# Altium PCB 电子脚铐本体电池转接板V3-改版.PcbDoc
Units mm, origin at the board's own origin, x right, y up, seen from the top; angles counter-clockwise.
Board outline 39.1 x 20.6 mm, 2 copper layers (Top Layer, Bottom Layer), stack 1.071 mm thick; 3 components, 2 nets, 5 pads, 0 vias.
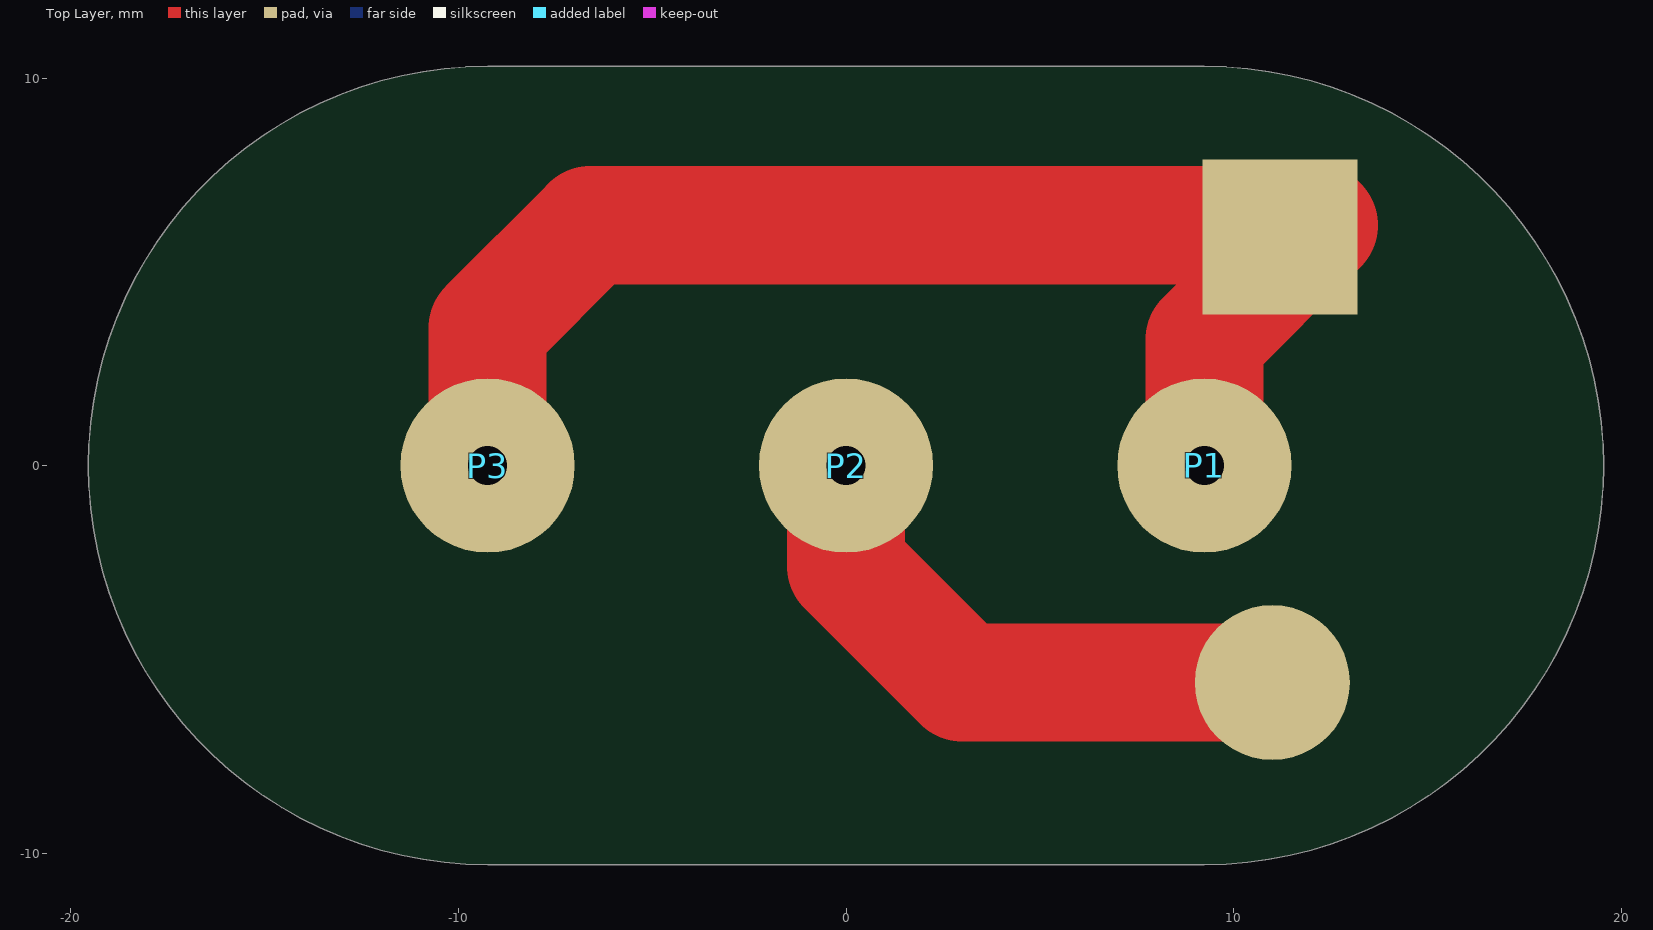
[diagram p0: Top Layer view]
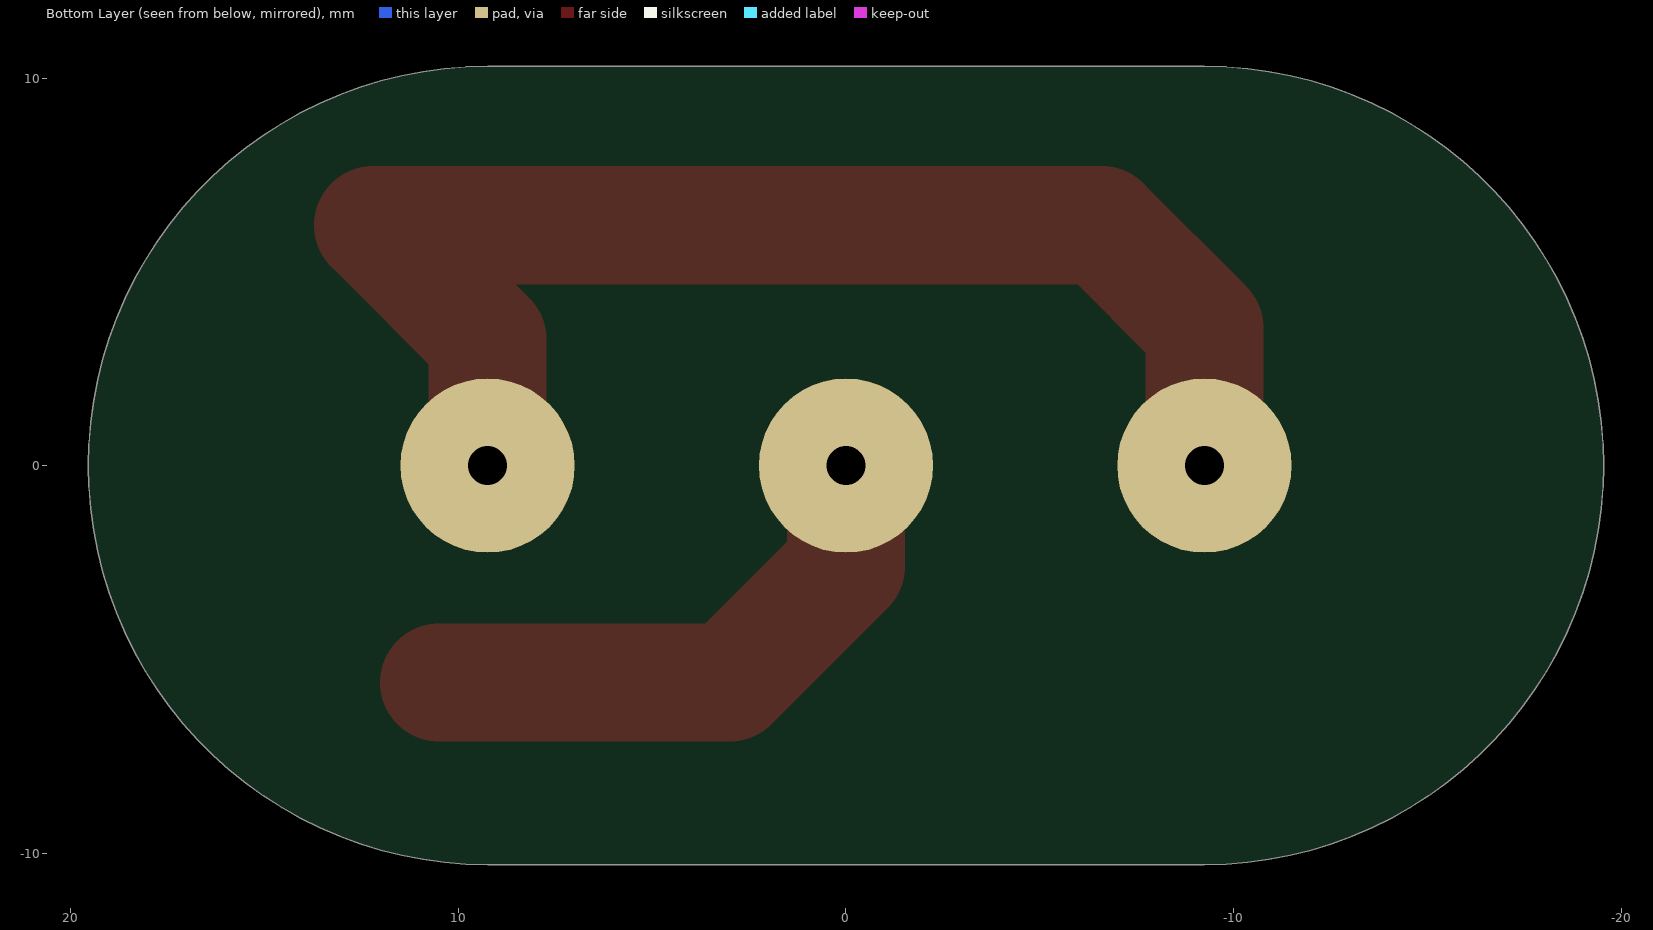
[diagram p1: Bottom Layer view, seen from below]

## Layer stack, top to bottom
Top Solder: solder mask 0.0102, Solder Resist, Dk 3.5
Top Layer: signal copper 0.0356
Dielectric 1: dielectric 1, FR-4, Dk 4.8
Bottom Layer: signal copper 0.0356
Bottom Solder: solder mask 0.0102, Solder Resist, Dk 3.5

## Board outline
-9.25,-10.3 9.25,-10.3 ccw(c9.25,0) 9.25,10.3 -9.25,10.3 ccw(c-9.25,0)

## Design rules (kind name [scope] priority, off if disabled: settings)
Clearance [All] p1: gap=0.254
PolygonConnect [All] p1: connectstyle=Relief reliefconductorwidth=0.254 reliefentries=4 polygonreliefangle="90 Angle" airgapwidth=0.254
RoutingVias [All] p1: holewidth=0.711 width=1.27 viastyle="Through Hole" minholewidth=0.711 minwidth=1.27 maxholewidth=0.711 maxwidth=1.27
SolderMaskExpansion [All] p1: expansion=0.102
Width [All] p1: maxlimit=25.4 minlimit=0.254 preferedwidth=0.254
29 further rules are at their usual default settings.

## Components (designator, comment, footprint, x,y, rotation, side; value= is the part's Value field where it differs from the comment)
P1 "" Pad3.2*3.2*7.1-SM 9.25,0 r0 top
P2 "" Pad3.2*3.2*7.1-SM 0,0 r0 top
P3 "" Pad3.2*3.2*7.1-SM -9.25,0 r0 top

## Footprints (in the part's own frame and the unit in brackets; to place one, negate y for a bottom-side part, rotate by r counter-clockwise, add the part's x,y. Pads: shape width x height; smd on the part's side, far side on the other; paste and mask are expansions set on the pad)
Pad3.2*3.2*7.1-SM [mm] "直径3.2mm 高7.1mm 带弹簧端子"
  round 4.5 hole 1: 1(0,0)
  body extent -1.6,-1.6 1.6,1.6, height 7

## Part data
P1 P2 P3: library part Pad-1.5x1-1, "Pad-1.5x1-1"

## Free pads (board coordinates)
  round 4 smd: ""(11,-5.6)
  rect 4x4 smd: ""(11.2,5.9)

## Nets (pads, with @x,y where several pads share a name; then routed paths per layer and width w, separated by ;. In a path a pad name is that pad's centre, name@x,y a point inside that pad or via, vN(x,y) a via of type N, cw(c..) or ccw(c..) an arc to the next point about the centre after c; other vN are vias at no path point)
BAT: P1.1 P3.1 pad.@11.2,5.9 | length 33.5
  Top Layer w3.048: P3.1 -9.25,3.55 -6.6,6.2 12.2,6.2 9.25,3.25 P1.1
GND: P2.1 pad.@11,-5.6 | length 14.3
  Top Layer w3.048: P2.1 0,-2.6 3,-5.6 pad.@10.5,-5.6

## Silkscreen, mask and mechanical layers (free items; w line width, h text height)
Mechanical 1:
  the board outline again, w0.127